# EAGLE board AR0130_DEV_BOARD (EAGLE 9.2.0)
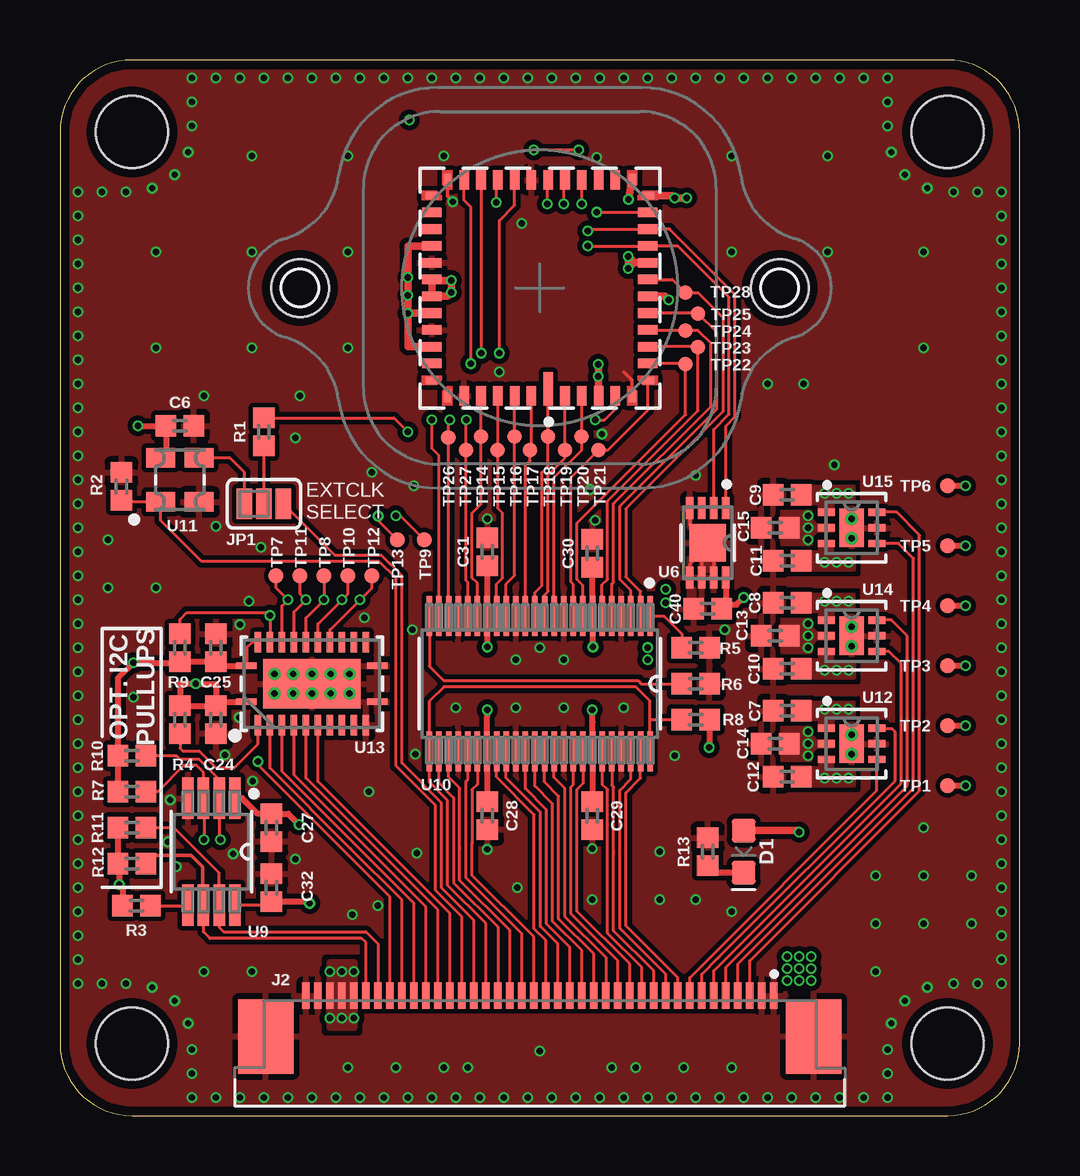
[diagram p0: board, top side]
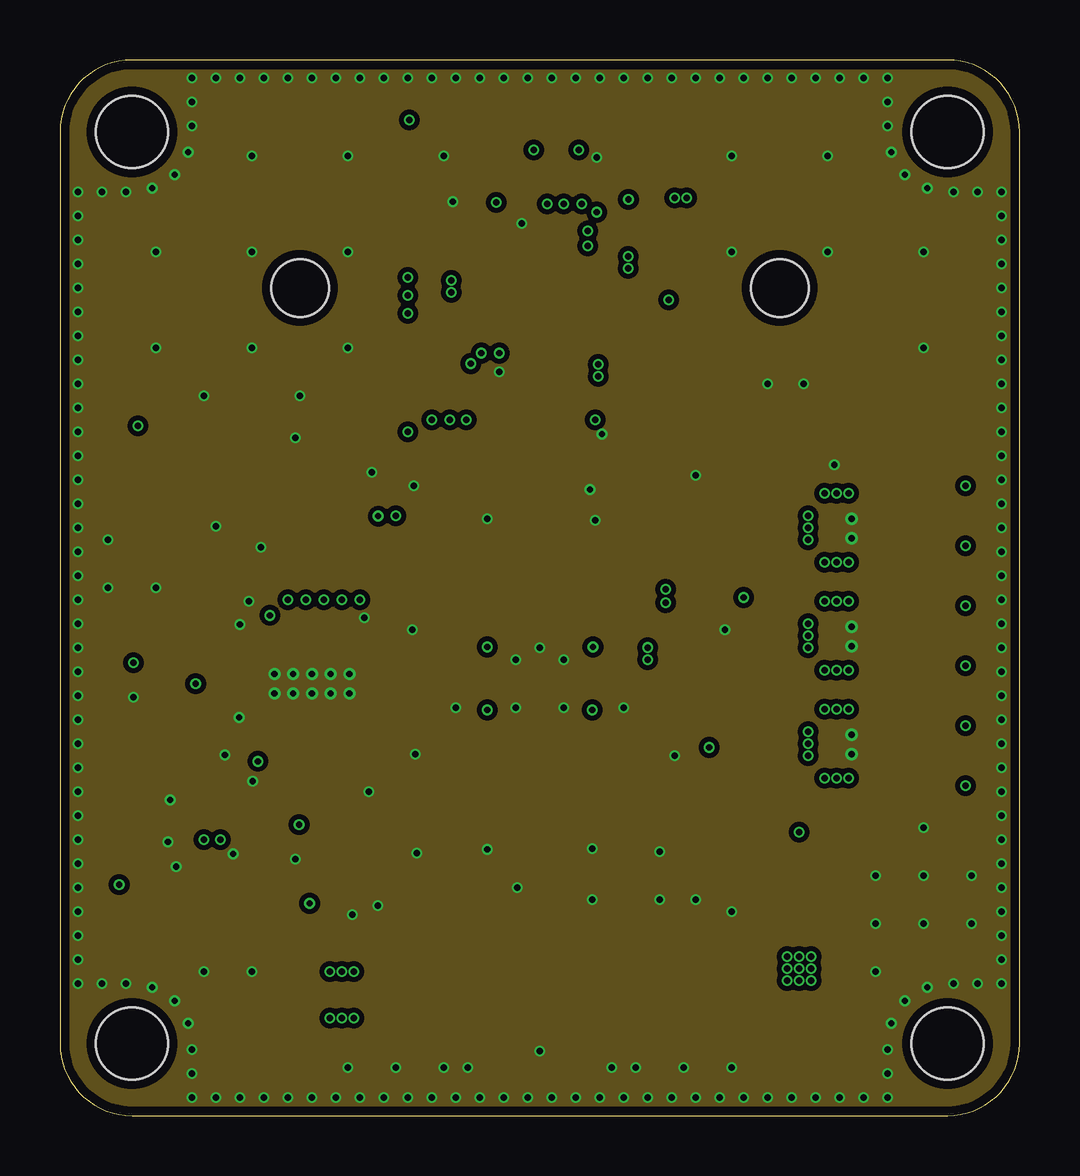
[diagram p1: board, inner layer Route2]
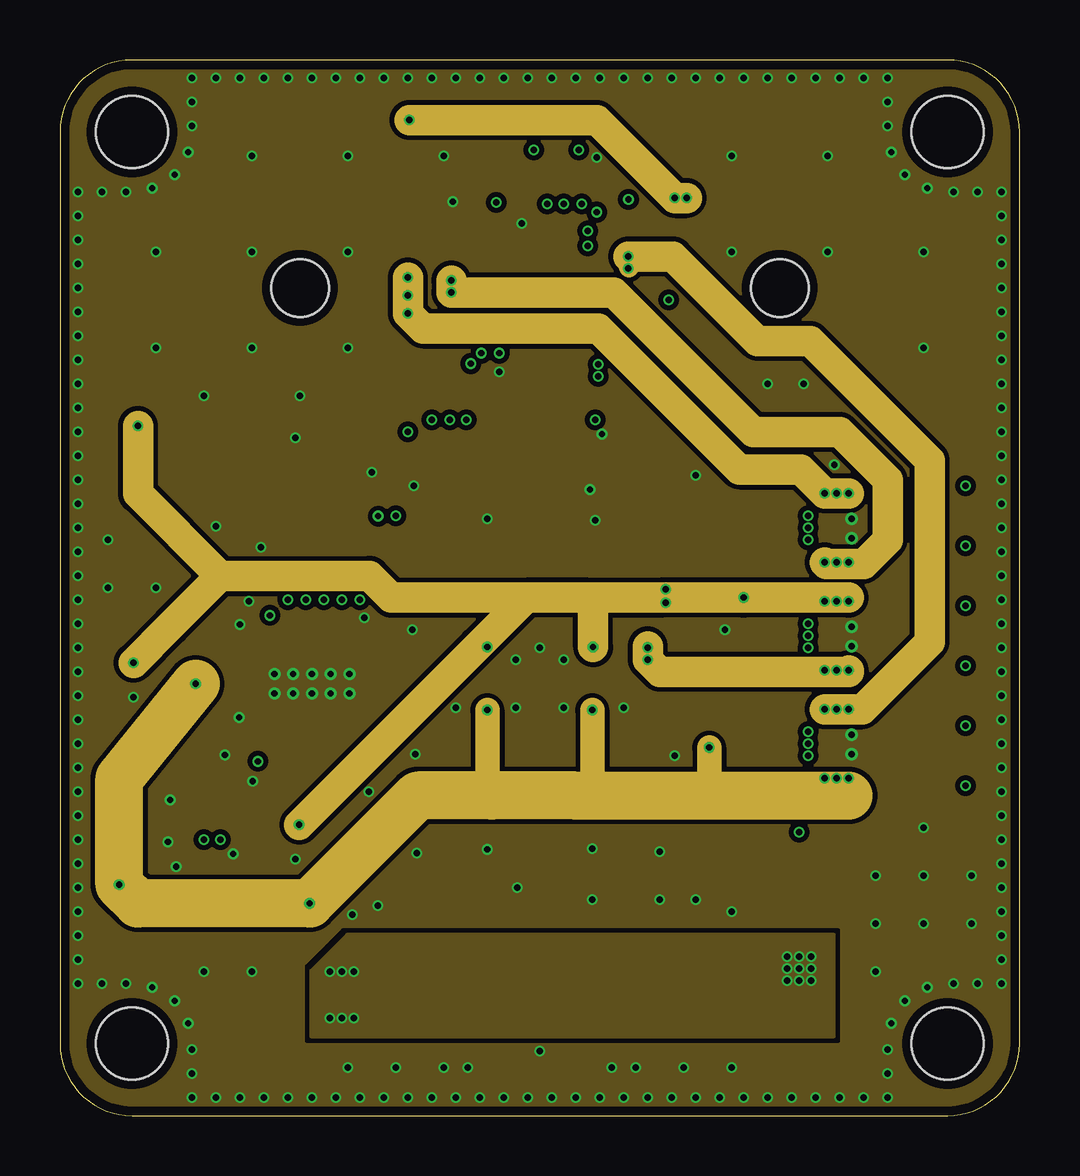
[diagram p2: board, inner layer Route15]
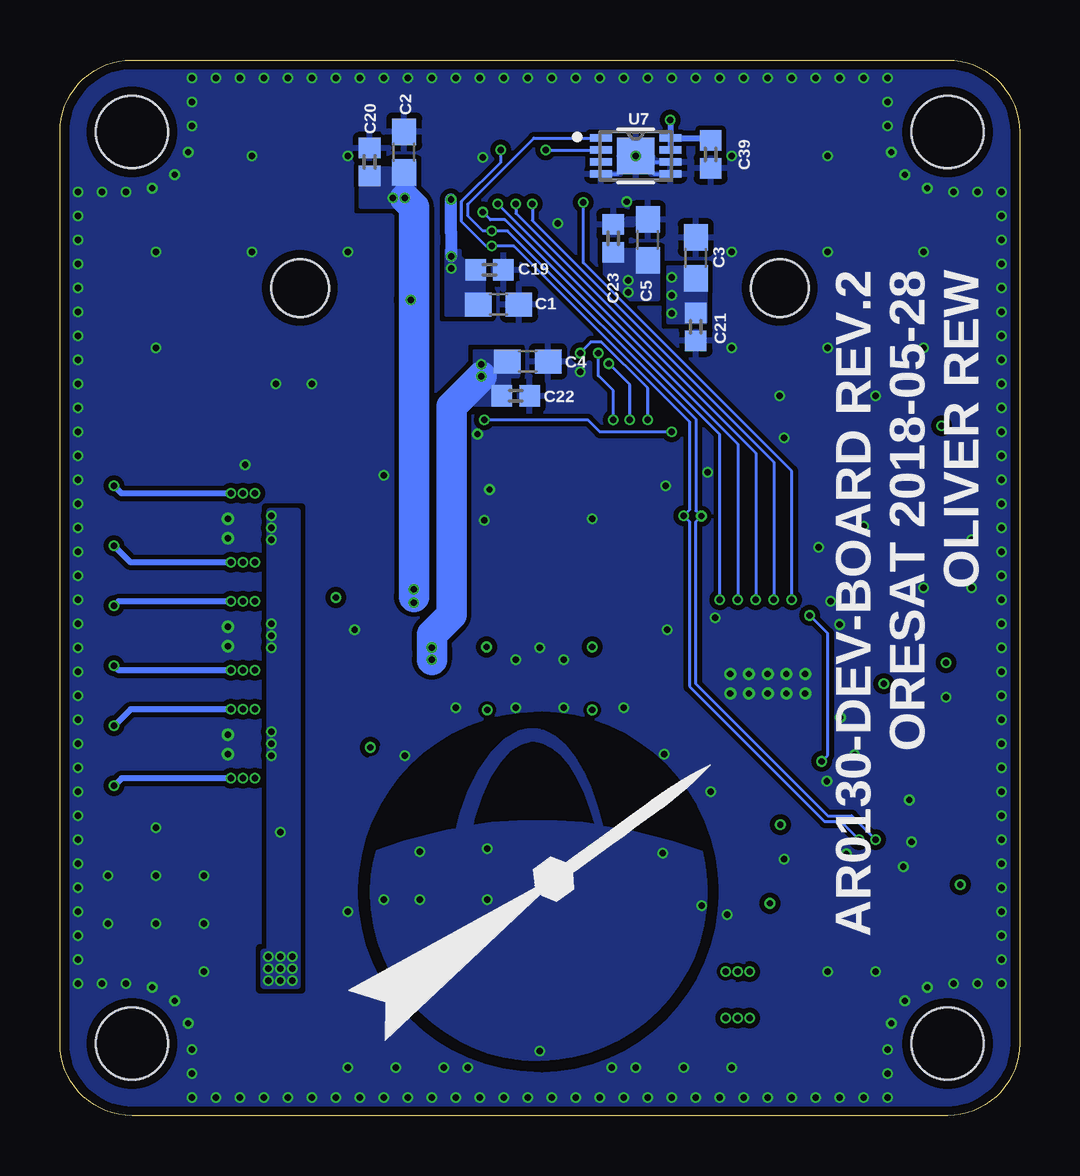
[diagram p3: board, bottom side, seen from below]

Size 40 x 44 mm. Coordinates in mm from the lower left corner, seen from the top.
Outline: 3,0 37,0 arc90 40,3 40,41 arc90 37,44 3,44 arc90 0,41 0,3 arc90 3,0
Copper layers (1*2*15*16): Top 0.035559375mm / dielectric 0.17018125mm / Route2 0.01778125mm / dielectric 47mil / Route15 0.01778125mm / dielectric 0.17018125mm / Bottom 0.035559375mm
Design rules "oshpark-4layer-tented": minimum track width 5mil, minimum drill 10mil, track to track 5mil, track to pad 5mil, pad to pad 5mil, via to via 5mil, smd to smd 5mil, copper to edge 15mil, drill to drill 6mil, minimum pad ring 4mil, minimum via ring 4mil, stop-mask expansion 2.5mil, vias tented up to drill 20mil, thermal gap 10mil
Holes 3 mm at 3,3 37,3 37,41 3,41

## Footprints (pad centres in the part's own frame; a part is rotated, then mirrored left to right if it is on the bottom)
0603 = smd 1.1 x 1: 1 -0.85,0; 2 0.85,0
0402 = smd 0.85 x 0.9: 1 -0.58,0; 2 0.58,0
LED-0603 = smd 1 x 1: A -0.877,0; C 0.877,0
TE_4-1734592-0 = smd 0.3 x 1.1: 1 -9.75,0; 2 -9.25,0; 3 -8.75,0; 4 -8.25,0; 5 -7.75,0; 6 -7.25,0; 7 -6.75,0; 8 -6.25,0; 9 -5.75,0; 10 -5.25,0; 11 -4.75,0; 12 -4.25,0; 13 -3.75,0; 14 -3.25,0; 15 -2.75,0; 16 -2.25,0; 17 -1.75,0; 18 -1.25,0; 19 -0.75,0; 20 -0.25,0; 21 0.25,0; 22 0.75,0; 23 1.25,0; 24 1.75,0; 25 2.25,0; 26 2.75,0; 27 3.25,0; 28 3.75,0; 29 4.25,0; 30 4.75,0; 31 5.25,0; 32 5.75,0; 33 6.25,0; 34 6.75,0; 35 7.25,0; 36 7.75,0; 37 8.25,0; 38 8.75,0; 39 9.25,0; 40 9.75,0 | smd 2.3 x 3.1: S1 11.42,1.7; S2 -11.42,1.7
SJ_3_PASTE1&2 = smd 0.635 x 1.27: 1 -0.813,0; 2 0,0; 3 0.813,0
TP06R = smd 0.6 x 0.6: TP 0,0
DFN8_2X3MC-M = smd 0.914 x 0.305: 1 -1.448,0.75; 2 -1.448,0.25; 3 -1.448,-0.25; 4 -1.448,-0.75; 5 1.448,-0.75; 6 1.448,-0.25; 7 1.448,0.25; 8 1.448,0.75 | smd 1.575 x 1.524: 9 0,0
DGK8-M = smd 1.727 x 0.483: 1 -2.223,0.975; 2 -2.223,0.325; 3 -2.223,-0.325; 4 -2.223,-0.975; 5 2.223,-0.975; 6 2.223,-0.325; 7 2.223,0.325; 8 2.223,0.975
DGV48 = smd 1.676 x 0.229: 1 -2.819,4.6; 2 -2.819,4.2; 3 -2.819,3.8; 4 -2.819,3.4; 5 -2.819,3; 6 -2.819,2.6; 7 -2.819,2.2; 8 -2.819,1.8; 9 -2.819,1.4; 10 -2.819,1; 11 -2.819,0.6; 12 -2.819,0.2; 13 -2.819,-0.2; 14 -2.819,-0.6; 15 -2.819,-1; 16 -2.819,-1.4; 17 -2.819,-1.8; 18 -2.819,-2.2; 19 -2.819,-2.6; 20 -2.819,-3; 21 -2.819,-3.4; 22 -2.819,-3.8; 23 -2.819,-4.2; 24 -2.819,-4.6; 25 2.819,-4.6; 26 2.819,-4.2; 27 2.819,-3.8; 28 2.819,-3.4; 29 2.819,-3; 30 2.819,-2.6; 31 2.819,-2.2; 32 2.819,-1.8; 33 2.819,-1.4; 34 2.819,-1; 35 2.819,-0.6; 36 2.819,-0.2; 37 2.819,0.2; 38 2.819,0.6; 39 2.819,1; 40 2.819,1.4; 41 2.819,1.8; 42 2.819,2.2; 43 2.819,2.6; 44 2.819,3; 45 2.819,3.4; 46 2.819,3.8; 47 2.819,4.2; 48 2.819,4.6
OSC_KYOCERA_KC2520B = smd 1.219 x 0.813: 1 -0.8,-0.925; 2 0.8,-0.925; 3 0.8,0.925; 4 -0.8,0.925
DRV6_1P6X1 = smd 0.7 x 0.3: 1 -1.05,0.65; 2 -1.05,0; 3 -1.05,-0.65; 4 1.05,-0.65; 5 1.05,0; 6 1.05,0.65 | smd 1.016 x 1.6: 7 0,0 | drill 0.254 pad 0.508: 8 0,0.375; 9 0,-0.438
RHL24_4P05X2P05 = smd 0.28 x 0.85: 1 -0.75,2.725; 12 -0.75,-2.725; 13 0.75,-2.725; 24 0.75,2.725 | smd 0.85 x 0.28: 2 -1.725,2.25; 3 -1.725,1.75; 4 -1.725,1.25; 5 -1.725,0.75; 6 -1.725,0.25; 7 -1.725,-0.25; 8 -1.725,-0.75; 9 -1.725,-1.25; 10 -1.725,-1.75; 11 -1.725,-2.25; 14 1.725,-2.25; 15 1.725,-1.75; 16 1.725,-1.25; 17 1.725,-0.75; 18 1.725,-0.25; 19 1.725,0.25; 20 1.725,0.75; 21 1.725,1.25; 22 1.725,1.75; 23 1.725,2.25 | smd 2.05 x 4.05: 25 0,0 | drill 0.254 pad 0.5: P$1 -0.406,-1.562; P$2 0.406,-1.562; P$3 -0.406,-0.781; P$4 0.406,-0.781; P$5 0.406,0; P$6 -0.406,0; P$7 0.406,0.781; P$8 -0.406,0.781; P$9 0.406,1.562; P$10 -0.406,1.562
M12-LENS-MOUNT = hole 2.4: -10,0; 10,0
AR0130CSSM00SPCA0−DRBR1-847AB = smd 0.4 x 1.4: 1 -0.35,4.2 | smd 0.4 x 0.8: 2 -1.05,4.5; 3 -1.75,4.5; 4 -2.45,4.5; 5 -3.15,4.5; 20 -3.15,-4.5; 21 -2.45,-4.5; 22 -1.75,-4.5; 23 -1.05,-4.5; 24 -0.35,-4.5; 25 0.35,-4.5; 26 1.05,-4.5; 27 1.75,-4.5; 28 2.45,-4.5; 29 3.15,-4.5; 44 3.15,4.5; 45 2.45,4.5; 46 1.75,4.5; 47 1.05,4.5; 48 0.35,4.5 | smd 0.3 x 0.5: 6 -3.85,4.5; 19 -3.85,-4.5; 30 3.85,-4.5; 43 3.85,4.5 | smd 0.5 x 0.3: 7 -4.5,3.85; 18 -4.5,-3.85; 31 4.5,-3.85; 42 4.5,3.85 | smd 0.8 x 0.4: 8 -4.5,3.15; 9 -4.5,2.45; 10 -4.5,1.75; 11 -4.5,1.05; 12 -4.5,0.35; 13 -4.5,-0.35; 14 -4.5,-1.05; 15 -4.5,-1.75; 16 -4.5,-2.45; 17 -4.5,-3.15; 32 4.5,-3.15; 33 4.5,-2.45; 34 4.5,-1.75; 35 4.5,-1.05; 36 4.5,-0.35; 37 4.5,0.35; 38 4.5,1.05; 39 4.5,1.75; 40 4.5,2.45; 41 4.5,3.15

## Placement (x,y rotation side)
C1  10uF  [0603]  21.72,33.81 0 bottom
C2  10uF  [0603]  25.66,40.16 90 bottom
C3  10uF  [0603]  13.5,35.75 90 bottom
C4  10uF  [0603]  20.5,31.44 0 bottom
C5  10uF  [0603]  15.5,36.5 90 bottom
C6  10nF  [0402]  5,28.75 180 top
C7  1.0uF  [0402]  30.31,16.88 180 top
C8  1.0uF  [0402]  30.31,21.38 180 top
C9  1.0uF  [0402]  30.31,25.88 180 top
C10  1.0uF  [0402]  30.31,18.62 180 top
C11  1.0uF  [0402]  30.31,23.12 180 top
C12  1.0uF  [0402]  30.31,14.12 180 top
C13  1.0uF  [0402]  29.81,20 180 top
C14  1.0uF  [0402]  29.81,15.5 180 top
C15  1.0uF  [0402]  29.81,24.5 180 top
C19  0.1uF  [0402]  22.09,35.25 0 bottom
C20  0.1uF  [0402]  27.09,39.75 90 bottom
C21  0.1uF  [0402]  13.5,32.88 270 bottom
C22  0.1uF  [0402]  21,30 0 bottom
C23  0.1uF  [0402]  16.94,36.56 90 bottom
C24  0.1uF  [0402]  6.5,16.5 270 top
C25  0.1uF  [0402]  6.5,19.5 90 top
C27  0.1uF  [0402]  8.81,12 270 top
C28  0.1uF  [0402]  17.81,12.5 270 top
C29  0.1uF  [0402]  22.19,12.5 270 top
C30  0.1uF  [0402]  22.19,23.44 90 top
C31  0.1uF  [0402]  17.81,23.5 90 top
C32  0.1uF  [0402]  8.81,9.5 90 top
C39  0.1uF  [0402]  12.88,40.06 270 bottom
C40  0.1uF  [0402]  27,21.12 180 top
D1  [LED-0603]  28.5,11 270 top
J2  4-1734592-04-1734592-0  [TE_4-1734592-0]  20,5 180 top
JP1  CLKSEL  [SJ_3_PASTE1&2]  8.5,25.5 0 top
R1  100  [0402]  8.5,28.5 90 top
R2  10k  [0402]  2.56,26.23 270 top
R3  10k  [0402]  3.19,8.75 180 top
R4  10k  [0402]  5,16.5 270 top
R5  10k  [0402]  26.5,19.5 180 top
R6  10k  [0402]  26.5,18 180 top
R7  10k  [0402]  3,15 180 top
R8  10k  [0402]  26.5,16.5 0 top
R9  10k  [0402]  5,19.5 270 top
R10  10k  [0402]  3,13.5 0 top
R11  10k  [0402]  3,10.5 0 top
R12  10k  [0402]  3,12 180 top
R13  1k  [0402]  27,11 90 top
TP1  TPTP06R  [TP06R]  37,13.75 0 top
TP2  TPTP06R  [TP06R]  37,16.25 0 top
TP3  TPTP06R  [TP06R]  37,18.75 0 top
TP4  TPTP06R  [TP06R]  37,21.25 0 top
TP5  TPTP06R  [TP06R]  37,23.75 0 top
TP6  TPTP06R  [TP06R]  37,26.25 0 top
TP7  TPTP06R  [TP06R]  9,22.5 0 top
TP8  TPTP06R  [TP06R]  11,22.5 0 top
TP9  TPTP06R  [TP06R]  13,22.5 0 top
TP10  TPTP06R  [TP06R]  12,22.5 0 top
TP11  TPTP06R  [TP06R]  10,22.5 0 top
TP12  TPTP06R  [TP06R]  15.19,24 0 top
TP13  TPTP06R  [TP06R]  14.06,24 0 top
TP14  TPTP06R  [TP06R]  17.54,28.31 0 top
TP15  TPTP06R  [TP06R]  18.24,27.74 0 top
TP16  TPTP06R  [TP06R]  18.94,28.31 0 top
TP17  TPTP06R  [TP06R]  19.6,27.74 0 top
TP18  TPTP06R  [TP06R]  20.34,28.31 0 top
TP19  TPTP06R  [TP06R]  21.04,27.74 0 top
TP20  TPTP06R  [TP06R]  21.74,28.31 0 top
TP21  TPTP06R  [TP06R]  22.44,27.74 0 top
TP22  TPTP06R  [TP06R]  26.07,31.32 0 top
TP23  TPTP06R  [TP06R]  26.6,32.02 0 top
TP24  TPTP06R  [TP06R]  26.07,32.73 0 top
TP25  TPTP06R  [TP06R]  26.6,33.42 0 top
TP26  TPTP06R  [TP06R]  16.19,28.27 0 top
TP27  TPTP06R  [TP06R]  16.93,27.74 0 top
TP28  TPTP06R  [TP06R]  26.07,34.3 0 top
U6  MCP9808T-E/MCDFN8_2X3MC-M  [DFN8_2X3MC-M]  27,23.88 270 top
U7  MCP9808T-E/MCDFN8_2X3MC-M  [DFN8_2X3MC-M]  16,40 0 bottom
U9  TCA9509DGKRDGK8-M  [DGK8-M]  6.31,11 270 top
U10  SN74AVCB164245VR  [DGV48]  20,18 270 top
U11  KC2520B27.0000C10E00  [OSC_KYOCERA_KC2520B]  5,26.5 0 top
U12  TPS71818-33DRVT  [DRV6_1P6X1]  33,15.5 0 top
U13  SN74AVCH8T245RHLR  [RHL24_4P05X2P05]  10.5,18 90 top
U14  TPS71928-28DRVT  [DRV6_1P6X1]  33,20 0 top
U15  TPS71928-28DRVT  [DRV6_1P6X1]  33,24.5 0 top
U$1  [M12-LENS-MOUNT]  20,34.5 0 top
U$2  AR0130CSSM00SPCA0−DRBR1-847AC-ILCC  [AR0130CSSM00SPCA0−DRBR1-847AB]  20,34.5 180 top
U$3  [PSAS_LOGO_15X15]  29.88,0.06 0 bottom

## Library data of the parts
C1-C5 = SparkFun-Capacitors; PROD_ID: CAP-11015
C6 = Oliver_Custom; PROD_ID: CAP-12416
C7-C15 = SparkFun-Capacitors; PROD_ID: CAP-12417
C19-C25 C27-C32 C39 C40 = SparkFun-Capacitors; PROD_ID: CAP-12416
D1 = SparkFun-LED
J2 U$1-U$3 = Oliver_Custom
JP1 = SparkFun-Passives
R1-R13 = SparkFun-Resistors
TP1-TP28 = testpad
U6 U7 = Oliver_Custom; MANUFACTURER_PART_NUMBER: MCP9808TEMC; VENDOR: Microchip
U9 = Oliver_Custom; MANUFACTURER_PART_NUMBER: TCA9509DGKR; VENDOR: Texas Instruments
U10 = Oliver_Custom; MANUFACTURER_PART_NUMBER: SN74AVCB164245VR; VENDOR: Texas Instruments
U11 = Oliver_Custom; MANUFACTURER_PART_NUMBER: KC2520B27.0000C10E00; VENDOR: Kyocera
U12 = Oliver_Custom; MANUFACTURER_PART_NUMBER: TPS7181833DRVT; VENDOR: Texas Instruments
U13 = Oliver_Custom; MANUFACTURER_PART_NUMBER: SN74AVCH8T245RHLR; VENDOR: Texas Instruments
U14 U15 = Oliver_Custom; MANUFACTURER_PART_NUMBER: TPS7192828DRVT; VENDOR: Texas Instruments

## Nets
1.8V: C1.1 C7.1 C19.1 TP2.TP U12.1 U$2.14 U$2.19
2.8V: C2.1 C6.2 C8.1 C20.1 C25.1 C27.1 C30.1 C31.1 C39.1 C40.1 R7.2 R9.2 R10.1 TP4.TP U6.8 U7.7 U7.8 U9.1 U10.7 U10.18 U11.4 U13.23 U13.24 U14.1 U$2.12 U$2.18
3.3V: C12.1 C24.1 C28.1 C29.1 C32.1 R3.2 R4.1 R8.2 R11.1 R12.2 TP1.TP U9.8 U10.31 U10.42 U12.3 U13.1
3.3V_EN: J2.8 U12.4
5V: C13.1 C14.1 C15.1 D1.A J2.36 J2.37 J2.38 U12.2 U14.2 U15.2
CLK_EN: J2.27 R2.2 U11.1
DE_0: J2.21 U10.30
DE_1: J2.20 U10.32
DE_2: J2.19 U10.33
DE_3: J2.18 U10.35
DE_4: J2.17 U10.36
DE_5: J2.16 U10.37
DE_6: J2.15 U10.38
DE_7: J2.14 U10.40
DE_8: J2.13 U10.41
DE_9: J2.12 U10.43
DE_10: J2.11 U10.44
DE_11: J2.10 U10.46
DI_0: TP14.TP U10.19 U$2.45
DI_1: TP15.TP U10.17 U$2.46
DI_2: TP16.TP U10.16 U$2.47
DI_3: TP17.TP U10.14 U$2.48
DI_4: TP18.TP U10.13 U$2.1
DI_5: TP19.TP U10.12 U$2.2
DI_6: TP20.TP U10.11 U$2.3
DI_7: TP21.TP U10.9 U$2.7
DI_8: TP22.TP U10.8 U$2.8
DI_9: TP23.TP U10.6 U$2.9
DI_10: TP24.TP U10.5 U$2.10
DI_11: TP25.TP U10.3 U$2.11
EXTCLK: JP1.2 R1.1
EXTCLK_E: J2.26 JP1.3
EXTCLK_I: JP1.1 U11.3
FLASH_E: J2.24 U10.26
FLASH_I: U10.23 U$2.26
GND: C1.2 C2.2 C3.2 C4.2 C5.2 C6.1 C7.2 C8.2 C9.2 C10.2 C11.2 C12.2 C13.2 C14.2 C15.2 C19.2 C20.2 C21.2 C22.2 C23.2 C24.2 C25.2 C27.2 C28.2 C29.2 C30.2 C31.2 C32.2 C39.2 C40.2 J2.1 J2.2 J2.39 J2.40 J2.S1 J2.S2 R2.1 R5.1 R6.1 R13.2 U6.4 U6.5 U6.6 U6.7 U6.9 U7.4 U7.5 U7.6 U7.9 U9.4 U10.4 U10.10 U10.15 U10.21 U10.28 U10.34 U10.39 U10.45 U11.2 U12.5 U12.7 U12.8 U12.9 U13.11 U13.12 U13.13 U13.25 U13.P$1 U13.P$2 U13.P$3 U13.P$4 U13.P$5 U13.P$6 U13.P$7 U13.P$8 U13.P$9 U13.P$10 U14.5 U14.7 U14.8 U14.9 U15.5 U15.7 U15.8 U15.9 U$2.6 U$2.25 U$2.30 U$2.35 U$2.39 U$2.44
HSYNC_E: J2.23 U10.27
HSYNC_I: TP26.TP U10.22 U$2.29
INPUT_DRVR_EN: J2.33 R9.1 U13.22
N$1: R1.2 U$2.5
N$2: D1.C R13.1
N$3: R5.2 U10.1
N$4: R3.1 U9.5
N$7: R4.2 U13.2
N$25: R6.2 U10.24
OE_BAR_E: J2.30 U13.5
OE_BAR_I: TP8.TP U13.19 U$2.23
OUTPUT_DRVR_EN: J2.25 R8.1 U10.25 U10.48
PIXCLK_E: J2.9 U10.47
PIXCLK_I: TP28.TP U10.2 U$2.13
RST_BAR_E: J2.28 U13.7
RST_BAR_I: TP9.TP U13.17 U$2.17
SADDR_E: J2.31 U13.4
SADDR_I: TP11.TP U13.20 U$2.24
SCL_E: J2.34 R12.1 U9.7
SCL_I: R7.1 TP12.TP U6.2 U7.2 U9.2 U$2.15
SDA_E: J2.35 R11.2 U9.6
SDA_I: R10.2 TP13.TP U6.1 U7.1 U9.3 U$2.16
STANDBY_E: J2.29 U13.6
STANDBY_I: TP10.TP U13.18 U$2.22
TRIG_E: J2.32 U13.3
TRIG_I: TP7.TP U13.21 U$2.27
VAA_EN: J2.3 U15.6
VAA_PIX_EN: J2.4 U15.4
VCC: C3.1 C9.1 C21.1 TP6.TP U15.1 U$2.34 U$2.38 U$2.40
VCC_1: C4.1 C10.1 C22.1 TP3.TP U14.3 U$2.4
VCC_2: C5.1 C11.1 C23.1 TP5.TP U15.3 U$2.36 U$2.37
VDD18_EN: J2.7 U12.6
VDD_IO_EN: J2.5 U14.6
VDD_PLL_EN: J2.6 U14.4
VSYNC_E: J2.22 U10.29
VSYNC_I: TP27.TP U10.20 U$2.28

## Tracks (layer width: path | path; a pad name or v marks a point on that pad's centre or on a via)
1.8V  (via drill 0.25)
  Top 0.254: v37.75,16.25 TP2.TP | U$2.14 23.95,35.55 | v23.69,35.81 23.75,35.75 23.69,35.69
  Top 0.305: 23.95,35.55 23.75,35.75 | 23.69,35.69 v23.69,35.31 23.93,35.55 U$2.14 | 23.82,38.83 23.85,38.83 U$2.19 v23.7,38.19
  Route15 0.813: v23.69,35.81 23.69,35.38 23.72,35.34
  Route15 1.27: v23.69,35.81 25.55,35.81 29.08,32.28 31.28,32.28 36.25,27.31 36.25,19.75 33.44,16.94 v32.88,16.94 v31.88,16.94
  Bottom 0.254: v32.88,16.94 37.06,16.94 v37.75,16.25
  Bottom 0.508: v23.69,35.81 23.69,36.81 23.7,36.81 v23.7,38.19
  other vias: 32.38,16.94
  pour Top (no thermals): 31.66,16.06 31.66,16.5 30.53,16.5 30.53,17.25 32.62,17.25 33.09,17.25 33.09,16.88 33.09,16.66 32.38,16.66 32.22,16.66 32.22,16.06
  pour Bottom (no thermals): 22.31,35.62 23.12,35.62 23.31,35.81 23.31,36.06 23.88,36.06 23.94,36.06 23.94,34.94 23.94,33.38 22.12,33.38 22.12,34.25 22.25,34.25 22.31,34.25
2.8V  (via drill 0.25)
  Top 0.127: 22.2,22.84 C30.1 | U10.18 17.81,20.83 | C25.1 6.67,18.75 | U13.23 8,19.73 7.78,19.5 U13.24
  Top 0.254: 22.2,22.84 U10.7 22.2,19.55 v22.22,19.53 | 17.81,20.83 C31.1 | R10.1 R7.2 2.42,18.23 v3.06,18.88 4.96,18.88 R9.2 C25.1 | U9.1 7.6,13.22 8.24,12.58 C27.1 9.51,12.58 v9.97,12.12 | 6.67,18.75 U13.24 | U10.18 17.8,19.54 v17.81,19.53 | v3.25,28.75 C6.2 4.42,27.64 U11.4 | U6.8 27.75,21.3 | 27.75,21.3 C40.1 | 27.75,21.3 28.2,21.3 v28.5,21.59 | v37.75,21.25 TP4.TP
  Top 0.305: U$2.18 25.52,38.35 v25.62,38.25 v26.12,38.25 | U$2.12 25.23,34.15 v25.38,34
  Route15 0.254: v32.88,21.44 32.88,21.59 | v28.5,21.59 28.28,21.38 v25.25,21.38 25.03,21.59 25,21.59 25,21.69 v25.25,21.94
  Route15 0.305: v17.81,19.53 17.42,19.53 17.42,19.58
  Route15 1.27: 19.44,21.59 17.42,19.58 v9.97,12.12 | 32.88,21.59 v28.5,21.59 25.03,21.59 | 22,21.59 25,21.59 | 22,21.59 19.44,21.59 | 19.44,21.59 13.81,21.59 12.91,22.49 6.68,22.49 | v3.06,18.88 4.59,20.41 6.68,22.49 | v22.22,19.53 22.22,21.38 22,21.59 | 6.68,22.49 3.25,25.92 v3.25,28.75 | v14.56,41.5 22.38,41.5 v25.62,38.25 v26.12,38.25
  Bottom 0.254: v14.56,41.5 v14.55,41.49 U7.8 | U7.8 U7.7 | U7.8 12.98,40.75 C39.1 | v32.88,21.44 37.56,21.44 v37.75,21.25 | 25.25,21.62 v25.25,21.38
  Bottom 0.305: v25.38,34 25.25,34
  Bottom 1.27: v25.62,38.25 25.25,37.88 25.25,34 25.25,21.62
  other vias: 31.88,21.44 32.38,21.44
  pour Top (no thermals): 31.66,20.56 31.66,21 30.53,21 30.53,21.75 32.62,21.75 33.09,21.75 33.09,21.38 33.09,21.16 32.38,21.16 32.22,21.16 32.22,20.56
  pour Bottom (rank 2, no thermals): 26.06,39.75 26.06,39.5 27.5,39.5 27.5,37.88 25.19,37.88 25.19,39.75
3.3V  (via drill 0.25)
  Top 0.127: 17.8,13.09 C28.1 | 22.2,13.09 C29.1 | U9.8 8.67,8.78 C32.1 | 2.61,10.31 R11.1 | C24.1 6.67,17.25
  Top 0.254: 17.8,13.09 U10.31 17.8,16.39 v17.81,16.91 | 22.2,13.09 U10.42 22.2,16.39 v22.19,16.91 | R12.2 R11.1 2.47,10.45 v2.47,9.62 2.61,9.49 R3.2 | 6.67,17.25 U13.1 | R8.2 27.08,15.34 v27.06,15.34 | C32.1 10.33,8.92 v10.41,8.84 | v37.75,13.75 TP1.TP | R4.1 C24.1 6.5,18 v5.66,18 5,18 R4.1
  Route15 0.254: 32.88,13.34 v32.88,14.06 v32.38,14.06 v31.88,14.06
  Route15 1.016: v17.81,16.91 17.81,13.53 18,13.34 | v22.19,16.91 22.19,14.03 21.5,13.34 | v27.06,15.34 27.06,13.34
  Route15 1.27: 27.06,13.34 27,13.34
  Route15 2: 32.88,13.34 27,13.34 21.5,13.34 18,13.34 14.91,13.34 v10.41,8.84 3.25,8.84 v2.47,9.62 2.47,14.06 v5.66,18
  Bottom 0.254: v32.88,14.06 37.44,14.06 v37.75,13.75
  pour Top (no thermals): 31.66,14.94 31.66,14.5 30.53,14.5 30.53,13.75 33.12,13.75 33.12,14.34 32.22,14.34 32.22,14.94
3.3V_EN
  Top 0.127: J2.8 26.25,5.75 34.05,13.55 U12.4
5V  (via drill 0.25)
  Top 0.305: D1.A 30.81,11.88 v30.81,11.81
  other vias: 12.25,6 11.75,6 11.25,6 11.25,4.06 11.75,4.06 12.25,4.06 31.19,15.5 31.19,16 31.19,15 31.19,20 31.19,19.5 31.19,20.5 31.19,24.5 31.19,25 31.19,24 30.81,6.12 31.31,6.12 31.31,6.62 30.81,6.62 30.31,6.62 30.31,6.12 30.31,5.62 30.81,5.62 31.31,5.62
  pour Top (rank 2, no thermals): 31.31,16.19 30.06,16.19 30.06,14.81 31.31,14.81 31.31,15.12 31.56,15.38 32.25,15.38 32.25,15.62 31.56,15.62 31.31,15.88
  pour Top (rank 2, no thermals): 31.31,20.69 30.06,20.69 30.06,19.31 31.31,19.31 31.31,19.62 31.56,19.88 32.25,19.88 32.25,20.12 31.56,20.12 31.31,20.38
  pour Top (rank 2, no thermals): 31.31,25.19 30.06,25.19 30.06,23.81 31.31,23.81 31.31,24.12 31.56,24.38 32.25,24.38 32.25,24.62 31.56,24.62 31.31,24.88
  pour Top (no thermals): 12.25,6.38 11.25,6.38 11.25,3.69 12.25,3.69
  pour Bottom (no thermals): 31.25,25.19 31.25,6.81 31.5,6.81 31.5,5.44 30.38,5.44 30.12,5.44 30.12,6.69 30.12,25.19
  pour Route15 (no thermals): 10.5,6 10.5,3.34 30.38,3.34 32.22,3.34 32.22,7.5 12,7.5
CLK_EN
  Top 0.127: J2.27 16.75,8.28 15.65,9.39 15.65,12.93 14,14.58 14,22.4 13.3,23.1 5.91,23.1 4.2,24.81 U11.1 2.63,25.57 R2.2
DE_0
  Top 0.127: U10.30 17.4,13.81 17.17,13.58 17.17,11.38 17.17,11.33 17.17,10.02 19.75,7.44 J2.21
DE_1
  Top 0.127: U10.32 18.2,14.11 19.77,12.54 19.77,7.78 20.25,7.3 J2.20
DE_2
  Top 0.127: U10.33 18.6,14.07 20.02,12.64 20.02,10.5 20.02,10.32 20.02,7.88 20.75,7.16 J2.19
DE_3
  Top 0.127: U10.35 19.4,13.63 20.28,12.75 20.28,10.5 20.28,10.43 20.28,7.99 21.25,7.02 J2.18
DE_4
  Top 0.127: U10.36 19.8,13.73 20.53,13 20.53,8.1 21.75,6.88 J2.17
DE_5
  Top 0.127: U10.37 20.2,13.9 20.79,13.31 20.79,8.2 22.25,6.74 J2.16
DE_6
  Top 0.127: U10.38 20.6,14.09 21.04,13.65 21.04,8.31 22.75,6.59 J2.15
DE_7
  Top 0.127: U10.40 21.4,13.8 21.29,13.69 21.29,8.41 23.25,6.45 J2.14
DE_8
  Top 0.127: U10.41 21.8,13.84 21.55,13.58 21.55,11 21.55,10.95 21.55,8.52 23.75,6.31 J2.13
DE_9
  Top 0.127: U10.43 22.6,13.81 22.83,13.58 22.83,7.59 24.25,6.17 J2.12
DE_10
  Top 0.127: U10.44 23,13.77 23.08,13.69 23.08,11 23.08,10.92 23.08,7.7 24.75,6.03 J2.11
DE_11
  Top 0.127: U10.46 23.8,14.03 23.34,13.56 23.34,7.8 25.25,5.89 J2.10
DI_0
  Top 0.127: U10.19 17.4,22.19 17.17,22.42 17.17,25.11 17.55,25.49 17.55,28.7 | 17.55,28.7 U$2.45 | TP14.TP 17.54,28.69 17.55,28.7
DI_1
  Top 0.127: U10.17 18.2,22.16 18.45,22.42 18.45,25.11 18.25,25.31 18.25,28 | 18.25,28 U$2.46 | TP15.TP 18.24,27.99 18.25,28
DI_2
  Top 0.127: U10.16 18.6,22.16 18.95,22.51 18.95,28.7 | 18.95,28.7 U$2.47 | TP16.TP 18.94,28.69 18.95,28.7
DI_3
  Top 0.127: U10.14 19.4,27.1 19.6,27.3 TP17.TP 19.65,28.05 U$2.48
DI_4
  Top 0.127: U10.13 19.8,21.8 20.09,22.09 20.09,26.81 20.35,27.07 20.35,28 | 20.35,28 U$2.1 | TP18.TP 20.34,28.01 20.35,28
DI_5
  Top 0.127: U10.12 20.2,21.7 20.35,21.85 20.35,26.7 21.05,27.41 TP19.TP | TP19.TP U$2.2 | TP19.TP
DI_6
  Top 0.127: U10.11 20.6,26.6 21.75,27.75 21.75,28 | 21.75,28 U$2.3 | TP20.TP 21.74,28.01 21.75,28
DI_7
  Top 0.127: U10.9 21.4,22.14 21.29,22.25 21.29,26.59 TP21.TP 22.84,27.74 24.5,29.4 U$2.7
DI_8
  Top 0.127: U10.8 21.8,22.1 21.55,22.35 21.55,24.69 26.07,29.22 TP22.TP 26.05,31.35 U$2.8
DI_9
  Top 0.127: U10.6 22.6,22.13 22.83,22.35 22.83,25.61 26.6,29.38 TP23.TP 26.57,32.05 U$2.9
DI_10
  Top 0.127: U10.5 23,22.17 23.08,22.25 23.08,25.5 27.12,29.55 27.12,32.2 26.6,32.73 TP24.TP 26.05,32.75 U$2.10
DI_11
  Top 0.127: U10.3 23.8,21.89 23.34,22.35 23.34,25.4 25.92,27.98 27.38,29.44 27.38,32.65 TP25.TP 26.57,33.45 U$2.11
EXTCLK
  Top 0.127: JP1.2 R1.1
EXTCLK_E
  Top 0.127: J2.26 17.25,8.14 15.9,9.49 15.9,13.04 14.25,14.69 14.25,22.5 13.4,23.35 11.46,23.35 JP1.3
EXTCLK_I
  Top 0.127: U11.3 7.08,27.43 7.69,26.81 JP1.1
FLASH_E
  Top 0.127: U10.26 15.8,13.86 16.41,13.25 16.41,9.7 18.25,7.86 J2.24
FLASH_I  (via drill 0.25)
  Top 0.127: v18.31,31.78 18.31,37.31 18.95,37.95 U$2.26 | U10.23 15.8,27.51 15.5,27.81 v15.5,29
  Bottom 0.127: v15.5,29 15.5,30.31 17.44,32.25 17.88,32.25 18.31,31.81 v18.31,31.78
GND  (via drill 0.25)
  Top 0.152: U6.4 26.25,24.62 26.75,24.12 | 26.75,24.12 U6.9 27.25,23.62 U6.7 | U6.6 26.75,23.5 | 26.75,23.5 26.75,24.12 | U6.5 26.25,23 26.75,23.5 | U$2.6 23.85,30.65 23.5,31 | U$2.30 16.15,38.32 v16.38,38.09
  Bottom 0.152: U7.4 16.75,39.25 16.25,39.75 U7.6 | U7.5 15.25,39.25 U7.9
  other vias: 22.31,24.81 22.19,11.12 17.81,11.09 17.81,24.88 6.88,15.03 4.59,13.16 7.22,10.91 9.81,10.69 7.47,16.59 3.06,17.44 8.03,13.94 4.5,11.41 4.84,10.38 16,40 18.31,31 20,19.5 21,17 19,17 19,19 21,19 23.5,17 16.5,17 27.72,20.25 22.59,28.41 7.5,20.47 31,30.5 29.5,30.5 32.28,27.12 22.09,26.09 0.75,5.5 0.75,6.5 0.75,7.5 0.75,8.5 0.75,9.5 0.75,10.5 0.75,11.5 0.75,12.5 0.75,13.5 0.75,14.5 0.75,15.5 0.75,16.5 0.75,17.5 0.75,18.5 0.75,19.5 0.75,20.5 0.75,21.5 0.75,22.5 0.75,23.5 0.75,24.5 0.75,25.5 0.75,26.5 0.75,27.5 0.75,28.5 0.75,29.5 0.75,30.5 0.75,31.5 0.75,32.5 0.75,33.5 0.75,34.5 0.75,35.5 0.75,36.5 0.75,37.5 0.75,38.5 2.75,5.5 5.5,2.75 4.78,4.78 6.5,0.75 1.75,5.5 3.84,5.34 5.34,3.84 5.5,0.75 5.5,1.75 7.5,0.75 8.5,0.75 9.5,0.75 10.5,0.75 11.5,0.75 12.5,0.75 13.5,0.75 14.5,0.75 15.5,0.75 16.5,0.75 17.5,0.75 18.5,0.75 19.5,0.75 20.5,0.75 21.5,0.75 22.5,0.75 23.5,0.75 24.5,0.75 25.5,0.75 26.5,0.75 27.5,0.75 28.5,0.75 29.5,0.75 30.5,0.75 31.5,0.75 32.5,0.75 33.5,0.75 34.5,0.75 34.5,43.25 6.5,43.25 7.5,43.25 8.5,43.25 9.5,43.25 10.5,43.25 11.5,43.25 12.5,43.25 13.5,43.25 14.5,43.25 15.5,43.25 16.5,43.25 17.5,43.25 18.5,43.25 19.5,43.25 20.5,43.25 21.5,43.25 22.5,43.25 23.5,43.25 24.5,43.25 25.5,43.25 26.5,43.25 27.5,43.25 28.5,43.25 29.5,43.25 30.5,43.25 31.5,43.25 32.5,43.25 33.5,43.25 39.25,38.5 37.25,38.5 34.5,41.25 35.22,39.22 38.25,38.5 36.16,38.66 34.66,40.16 34.5,42.25 5.5,43.25 5.5,41.25 2.75,38.5 4.78,39.22 5.5,42.25 5.34,40.16 3.84,38.66 1.75,38.5 34.5,2.75 37.25,5.5 35.22,4.78 34.5,1.75 34.66,3.84 36.16,5.34 39.25,5.5 38.25,5.5 39.25,6.5 39.25,7.5 39.25,8.5 39.25,9.5 39.25,10.5 39.25,11.5 39.25,12.5 39.25,13.5 39.25,14.5 39.25,15.5 39.25,16.5 39.25,17.5 39.25,18.5 39.25,19.5 39.25,20.5 39.25,21.5 39.25,22.5 39.25,23.5 39.25,24.5 39.25,25.5 39.25,26.5 39.25,27.5 39.25,28.5 39.25,29.5 39.25,30.5 39.25,31.5 39.25,32.5 39.25,33.5 39.25,34.5 39.25,35.5 39.25,36.5 39.25,37.5 4,36 4,32 8,32 12,32 12,36 8,36 8,40 12,40 28,40 28,36 32,36 32,40 36,36 36,32 36,8 36,12 34,10 10,30 6,30 14.75,26.25 7.88,21.44 4,22 2,22 2,24 6,6 12.19,8.38 14.88,10.94 12.88,13.5 19.06,9.5 22.19,9 25,9 25,11 26.5,9 34,6 38,10 36,10 34,8 38,8 19.25,37.19 22.38,39.94 14.69,20.25 12.69,20.75 14.81,15.06 28,2 26,2 24,2 23,2 20,2.69 17,2 16,2 14,2 12,2 8,6 9.81,28.25 8.38,23.69 6.5,24.56 26.5,26.69 25.62,15 13,26.81 28,8.5 13.25,8.75
  pour Top (isolate 0.2, rank 3): 0,0 40,0 40,44 0,44
  pour Route2 (isolate 0.2): 0,0 40,0 40,44 0,44
  pour Route15 (isolate 0.2, rank 3): 0,0 40,0 40,44 0,44
  pour Bottom (isolate 0.2, rank 3): 0,0 40,0 40,44 0,44
  pour Bottom: 25.5,16.5 29,13 29,6 29,4.5 26,1.5 16,1.5 12,5.5 11.5,6 11.5,13.5 16,18 19.5,18 24,18
HSYNC_E
  Top 0.127: U10.27 16.2,14.11 16.66,13.65 16.66,11.19 16.66,11.12 16.66,9.81 18.75,7.72 J2.23
HSYNC_I  (via drill 0.25)
  Top 0.127: U10.22 16.2,28 | 16.2,28 16.2,28.95 v16.25,29 | 16.81,38.96 U$2.29 16.85,38.15 17.12,37.88 v17.12,31.34 | TP26.TP 16.19,28.01 16.2,28
  Bottom 0.127: v16.25,29 16.25,30.47 v17.12,31.34
INPUT_DRVR_EN  (via drill 0.25)
  Top 0.127: J2.33 13.75,9.11 8.25,14.61 v8.25,14.76 | U13.22 v8.75,20.85 8.63,20.97 5.28,20.97 5,20.69 R9.1
  Bottom 0.127: v8.25,14.76 8,15.01 8,20.1 v8.75,20.85
N$1  (via drill 0.25)
  Top 0.127: R1.2 13.92,29.08 v14.5,28.5 | U$2.5 23.12,29.98 23.12,29.44 22.69,29 v22.31,29
  Bottom 0.127: v14.5,28.5 17.5,28.5 18,29 v22.31,29
N$2
  Top 0.254: D1.C 27.3,10.12 R13.1
N$3
  Top 0.127: U10.1 25.18,20.82 25.92,20.08 R5.2
N$4
  Top 0.127: R3.1 5.31,8.75 U9.5
N$7
  Top 0.127: R4.2 5,15.31 5.12,15.19 5.81,15.19 6.5,14.5 7.25,14.5 8.25,15.5 U13.2
N$25
  Top 0.127: R6.2 24.23,18 24.11,18.13 16,18.13 15.4,18.73 U10.24
OE_BAR_E
  Top 0.127: J2.30 15.25,8.71 9.75,14.21 U13.5
OE_BAR_I  (via drill 0.25)
  Top 0.127: U13.19 10.25,20.75 v11,21.5 TP8.TP | v21,38 21,38.95 U$2.23
  Bottom 0.127: v21,38 21,37.61 11,27.61 v11,21.5
OUTPUT_DRVR_EN
  Top 0.127: J2.25 17.75,8 16.16,9.6 16.16,13.14 15.4,13.9 U10.25 15.4,17.27 16,17.88 24,17.88 24.6,17.27 24.6,16.5 | U10.48 24.6,16.5 | R8.1 24.6,16.5
PIXCLK_E
  Top 0.127: U10.47 24.2,14.07 23.59,13.46 23.59,7.91 25.75,5.75 J2.9
PIXCLK_I
  Top 0.127: U10.2 24.2,21.85 23.59,22.46 23.59,25.29 27.63,29.34 27.63,33.27 26.6,34.3 TP28.TP 25.52,34.85 U$2.13
RST_BAR_E
  Top 0.127: J2.28 16.25,8.43 10.75,13.93 U13.7
RST_BAR_I  (via drill 0.25)
  Top 0.127: U13.17 11.25,20.25 v12.5,21.5 13,22 TP9.TP | 24.48,37.62 U$2.17 v22.38,37.65 v22.38,37.66
  Bottom 0.127: v12.5,21.5 12.5,28.39 21.45,37.34 22.06,37.34 v22.38,37.66
SADDR_E
  Top 0.127: U13.4 9.25,16 9.25,15.64 9.25,14.35 14.75,8.85 J2.31
SADDR_I  (via drill 0.25)
  Top 0.127: U13.20 9.75,21 v10.25,21.5 10,21.75 TP11.TP | v20.31,38 20.31,38.96 U$2.24
  Bottom 0.127: v20.31,38 20.31,37.31 10.25,27.25 v10.25,21.5
SCL_E
  Top 0.127: J2.34 13.25,7.16 12.75,7.66 6.81,7.66 6.64,7.84 U9.7 6.64,10.11 4.75,12 R12.1
SCL_I  (via drill 0.25)
  Top 0.127: v6.69,11.5 6.64,11.55 U9.2 6.64,14 5.79,14.85 5.01,14.85 4.86,15 R7.1 3.64,14.94 | v22,36.25 U$2.15 25.75,36.25 27.89,34.11 27.89,29.23 27.25,28.59 U6.2 | v21.62,40.25 v19.75,40.25 | v14,25 14.19,25 TP12.TP
  Bottom 0.127: v6.69,11.5 7.43,12.25 8.11,12.25 13.75,17.89 13.75,24.75 v14,25 13.75,25.25 13.75,28.93 21.08,36.25 v22,36.25 22.25,36.25 23.25,37.25 23.25,38.1 21.62,39.73 v21.62,40.25 | v19.75,40.25 U7.2
SDA_E
  Top 0.127: J2.35 12.75,7.21 12.58,7.38 6.25,7.38 5.99,7.65 5.99,8.69 U9.6
  Top 0.152: R11.2 3.92,10.84 5.47,10.84 5.94,10.38 5.94,8.74 5.99,8.69
SDA_I  (via drill 0.25)
  Top 0.127: v6,11.5 U9.3 5.99,14.29 5.69,14.59 5.16,14.59 4.06,13.5 R10.2 | v22,36.88 22.07,36.95 U$2.16 25.41,36.95 28.14,34.22 28.14,29.13 27.75,28.74 U6.1 | TP13.TP 13.27,24.8 v13.27,24.98
  Bottom 0.127: v6,11.5 7,12.5 8,12.5 13.5,18 13.5,24.75 v13.27,24.98 13.5,25.22 13.5,29.03 21.34,36.88 v22,36.88 22.38,36.88 23,37.5 23,38 20.25,40.75 U7.1
STANDBY_E
  Top 0.127: U13.6 10.25,15.5 10.25,15.38 10.25,14.07 15.75,8.57 J2.29
STANDBY_I  (via drill 0.25)
  Top 0.127: U13.18 10.75,20.5 v11.75,21.5 12,21.75 TP10.TP | v21.75,38 U$2.22
  Bottom 0.127: v21.75,38 11.75,28 v11.75,21.5
TRIG_E
  Top 0.127: U13.3 8.75,16 8.75,15.78 8.75,14.49 12.12,11.12 14.25,8.99 J2.32
TRIG_I  (via drill 0.25)
  Top 0.127: U13.21 9.25,21.25 v9.5,21.5 9,22 TP7.TP | v18.19,38.06 18.19,38.94 U$2.27
  Bottom 0.127: v18.19,38.06 18.19,35.55 9.5,26.86 v9.5,21.5
VAA_EN
  Top 0.127: J2.3 28.75,6.45 35.83,13.53 35.83,24.2 34.88,25.15 U15.6
VAA_PIX_EN
  Top 0.127: J2.4 28.25,6.31 35.58,13.64 35.58,23.23 34.95,23.85 U15.4
VCC  (via drill 0.25)
  Top 0.254: v37.75,26.25 TP6.TP
  Top 0.305: U$2.34 14.5,36.25 v14.5,34.94 v14.5,33.44 | U$2.40 14.5,32.05 v14.5,33.44 | U$2.38 v14.5,33.45 v14.5,33.44
  Route15 1.27: v32.88,25.94 v31.88,25.94 30.88,26.94 28.31,26.94 22.44,32.81 15.12,32.81 v14.5,33.44 v14.5,34.19 v14.5,34.94
  Bottom 0.254: v32.88,25.94 37.44,25.94 v37.75,26.25
  other vias: 32.38,25.94
  pour Top (no thermals): 31.66,25.06 31.66,25.5 30.53,25.5 30.53,26.25 32.62,26.25 33.09,26.25 33.09,25.88 33.09,25.66 32.38,25.66 32.22,25.66 32.22,25.06
  pour Bottom (no thermals): 13.06,35.38 14.69,35.38 14.69,33.44 14.69,33.06 13.06,33.06
VCC_1  (via drill 0.25)
  Top 0.254: v37.75,18.75 TP3.TP | v22.44,30.81 v22.45,30.8
  Top 0.305: v22.44,31.31 v22.44,30.81 | v22.45,30.8 U$2.4
  Route15 1.27: v32.88,18.56 32.88,18.5 25,18.5 v24.5,19 24.5,19.56
  Bottom 0.254: v32.88,18.56 37.56,18.56 v37.75,18.75
  Bottom 1.27: v22.44,30.81 23.69,29.56 23.69,20.88 24.5,20.06 v24.5,19.5 v24.5,19
  other vias: 32.38,18.56 31.88,18.56
  pour Top (no thermals): 31.66,19.44 31.66,19 30.53,19 30.53,18.25 33.12,18.25 33.12,18.84 32.22,18.84 32.22,19.44
  pour Bottom (no thermals): 21.25,29.62 21.25,30.81 20.88,30.81 20.88,31.88 22.56,31.88 22.75,31.88 22.75,29.81 22.75,29.62
VCC_2  (via drill 0.25)
  Top 0.254: v37.75,23.75 TP5.TP
  Top 0.305: v16.31,34.81 15.54,34.81 U$2.36 U$2.37 16.15,34.15 v16.31,34.31 v16.31,34.81
  Route15 1.27: v31.88,23.06 31.94,23 33.5,23 34.5,24 34.5,26.5 32.5,28.5 28.91,28.5 23.1,34.31 v16.31,34.31 v16.31,34.81
  Bottom 0.254: v32.88,23.06 37.06,23.06 v37.75,23.75
  other vias: 32.38,23.06
  pour Top (no thermals): 31.66,23.94 31.66,23.5 30.53,23.5 30.53,22.75 33.12,22.75 33.12,23.34 32.22,23.34 32.22,23.94
  pour Bottom (no thermals): 15.06,36.12 15.06,34 16.19,34 16.25,34 17.19,34.94 17.31,35.06 17.31,36.31 16.56,36.31 16.56,36.19 16.56,36.12
VDD18_EN
  Top 0.127: J2.7 26.75,5.89 27.43,6.57 27.49,6.63 34.81,13.95 34.81,16 34.69,16.12 34.08,16.12 U12.6
VDD_IO_EN
  Top 0.127: J2.5 27.75,6.17 35.32,13.74 35.32,19.98 34.65,20.65 U14.6
VDD_PLL_EN
  Top 0.127: J2.6 27.25,6.03 35.07,13.85 35.07,18.83 34.55,19.35 U14.4
VSYNC_E
  Top 0.127: U10.29 17,14 16.92,13.92 16.92,11.25 16.92,11.22 16.92,9.91 19.25,7.58 J2.22
VSYNC_I  (via drill 0.25)
  Top 0.127: U10.20 17,22.23 16.92,22.31 16.92,28 | v16.94,29 16.92,28.98 16.92,28 | v17.56,31.78 17.56,38.99 U$2.28 | TP27.TP 16.93,27.99 16.92,28
  Bottom 0.127: v16.94,29 16.94,30.22 17.56,30.84 v17.56,31.78

## Text on the board
tPlace: EXTCLK / SELECT | OPT. I2C / PULLUPS
bPlace: AR0130-DEV-BOARD REV.2 / ORESAT 2018-05-28 / OLIVER REW